# Altium PCB Access_System_Bmduino_V1.2.PcbDoc
Units mil, origin at the board's own origin, x right, y up, seen from the top; angles counter-clockwise.
Board outline 1488.9 x 1907.9 mil, 2 copper layers (Top Layer, Bottom Layer); 34 components, 20 nets, 152 pads, 22 vias.
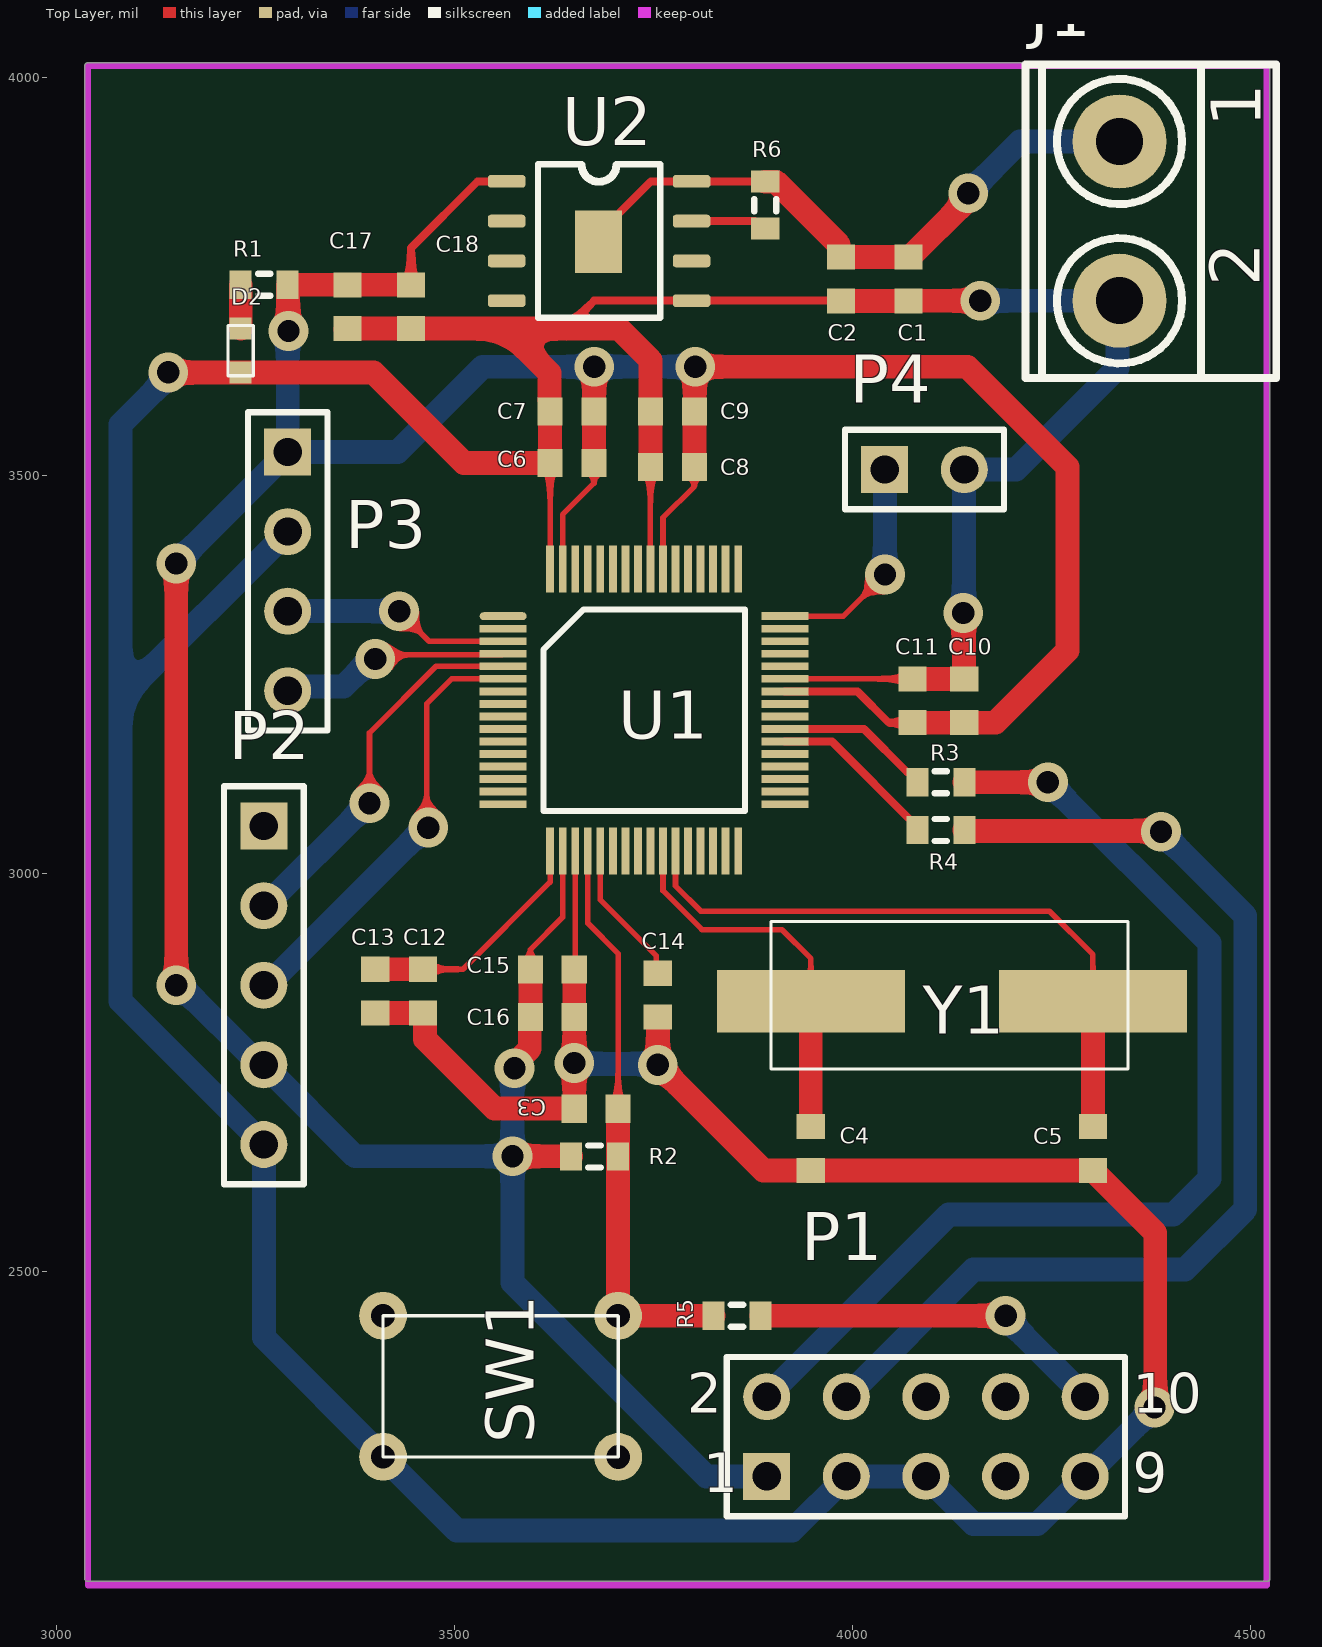
[diagram p0: Top Layer view]
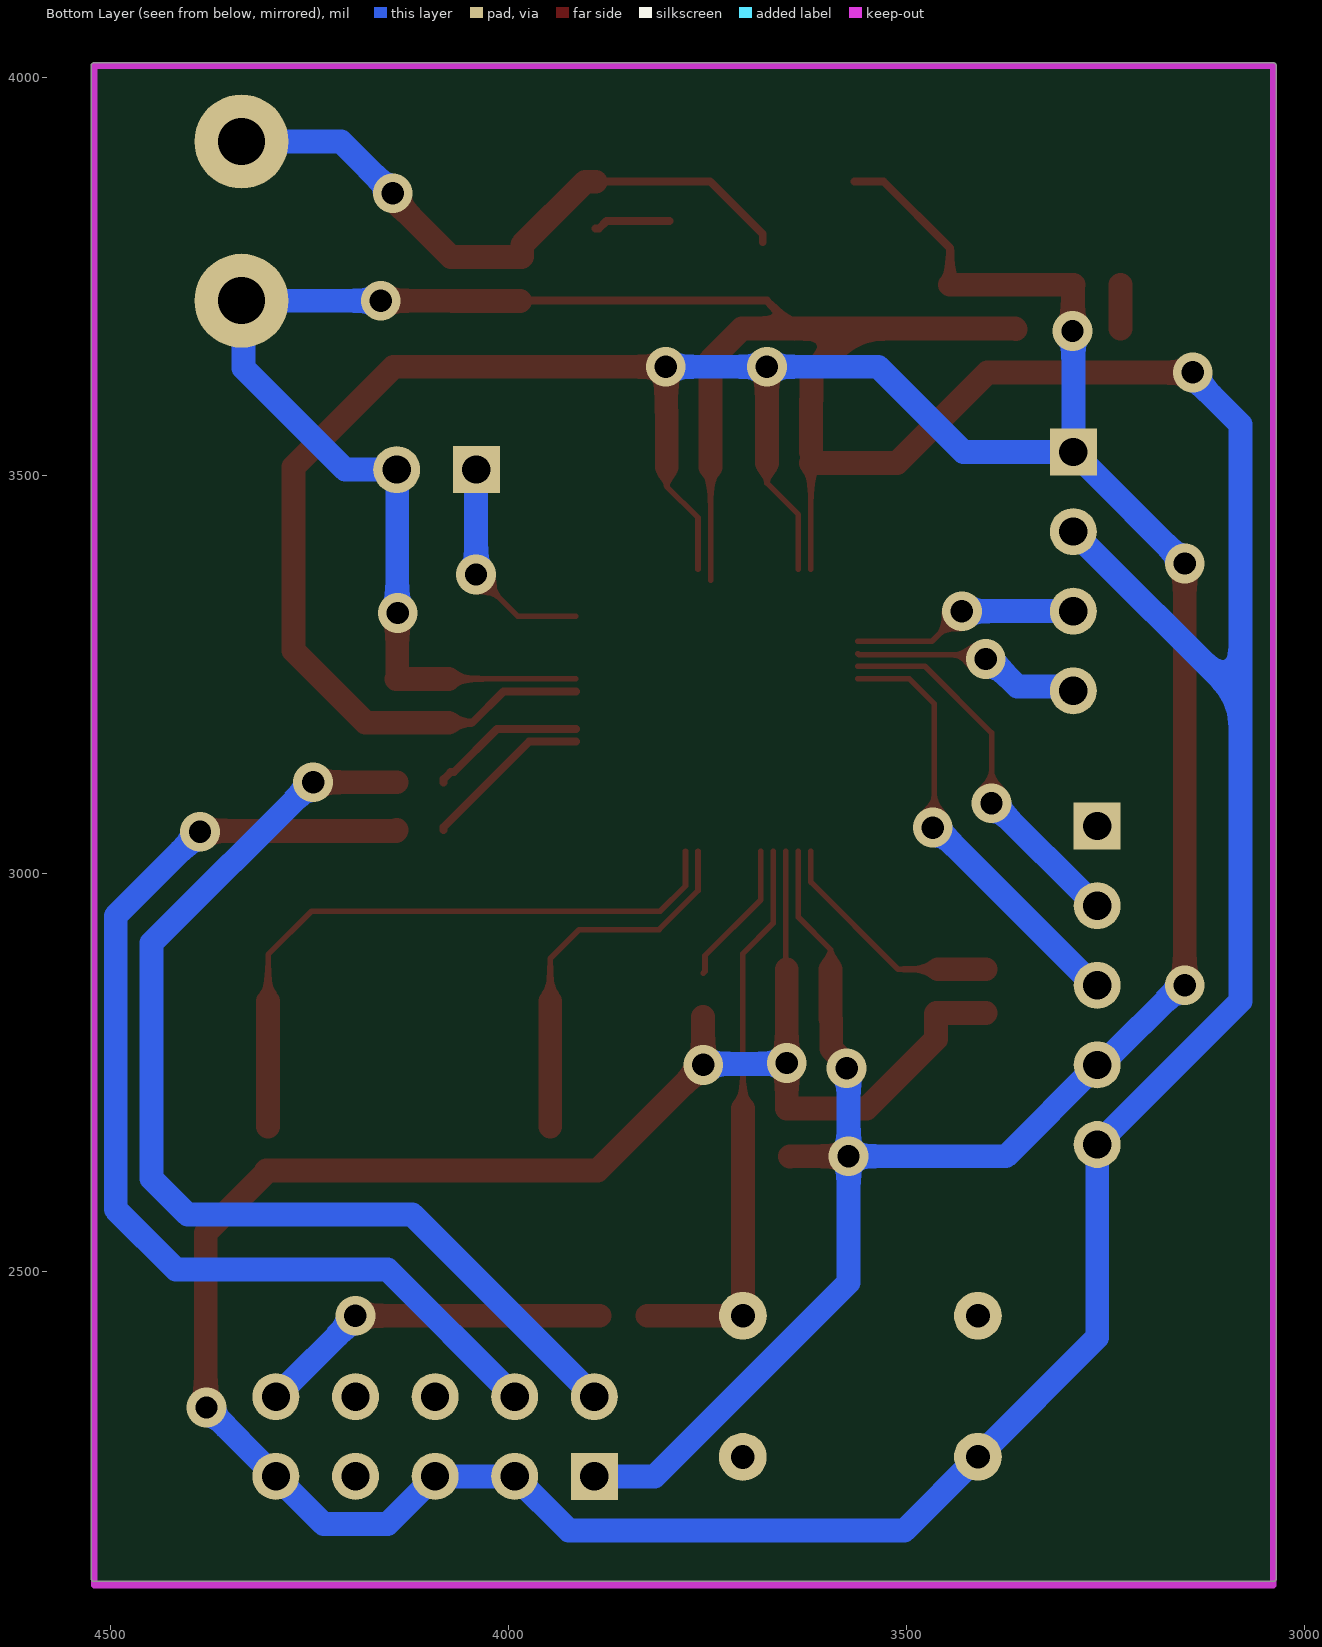
[diagram p1: Bottom Layer view, seen from below]

## Layer stack, top to bottom
Top Solder: solder mask 0.4, Solder Resist, Dk 3.5
Top Layer: signal copper 1.4
Dielectric 1: dielectric 12.6, FR-4, Dk 4.8
Bottom Layer: signal copper 1.4
Bottom Solder: solder mask 0.4, Solder Resist, Dk 3.5

## Board outline
3035.05,2115 3035.05,4015 cw(c3039,4015) 3039,4018.95 4520,4018.95 cw(c4520,4015) 4523.95,4015 4523.95,2115 cw(c4520,2115) 4520,2111.05 3039,2111.05 cw(c3039,2115)

## Design rules (kind name [scope] priority, off if disabled: settings)
Clearance [All] p1: gap=4 ignorepadtopadclearanceinfootprint=FALSE except(0: Arc-Hole Track-Hole SMDPad-Hole THPad-Hole Via-Hole Fill-Hole Poly-Hole Region-Hole Text-Hole)
PolygonConnect [All] p1: connectstyle=Relief reliefconductorwidth=10 reliefentries=4 polygonreliefangle="90 Angle" airgapwidth=10
RoutingVias [All] p1: holewidth=28 width=50 viastyle="Through Hole" minholewidth=28 minwidth=50 maxholewidth=28 maxwidth=50
SolderMaskExpansion [All] p1: expansion=4 istentingtop=FALSE
Width [All] p1: maxlimit=30 minlimit=7 preferedwidth=10 minimp=50.000000 maximp=50.000000 favimp=50.000000
30 further rules are at their usual default settings.

## Components (designator, comment, footprint, x,y, rotation, side; value= is the part's Value field where it differs from the comment)
C1 "Cap Semi" 1608[0603] 4070,3747.44 r90 top value=0.1uF
C2 "Cap Semi" 1608[0603] 3985,3747.44 r90 top value=10uF
C3 "Cap Semi" 1608[0603] 3677.56,2705 r180 top value=0.01uF
C4 "Cap Semi" 1608[0603] 3947.16,2655 r270 top value=12pF
C5 "Cap Semi" 1608[0603] 4301.49,2655 r90 top value=12pF
C6 "Cap Semi" 1608[0603] 3647.28,3516 r180 top value=2.2uF
C7 "Cap Semi" 1608[0603] 3647.28,3581 r0 top value=0.1uF
C8 "Cap Semi" 1608[0603] 3773.27,3511 r180 top value=2.2uF
C9 "Cap Semi" 1608[0603] 3773.27,3581 r0 top value=0.1uF
C10 "Cap Semi" 1608[0603] 4140,3217.44 r90 top value=2.2uF
C11 "Cap Semi" 1608[0603] 4075,3217.44 r270 top value=0.1uF
C12 "Cap Semi" 1608[0603] 3460,2852.56 r270 top value=2.2uF
C13 "Cap Semi" 1608[0603] 3400,2852.56 r90 top value=0.1uF
C14 "Cap Semi" 1608[0603] 3755,2847.56 r90 top value=0.1uF
C15 "Cap Semi" 1608[0603] 3622.44,2880 r0 top value=2.2uF
C16 "Cap Semi" 1608[0603] 3622.44,2820 r180 top value=0.1uF
C17 "Cap Semi" 1608[0603] 3365,3712.44 r90 top value=0.1uF
C18 "Cap Semi" 1608[0603] 3444.88,3712.44 r90 top value=10uF
D2 "green_light" LED_Green 3230.94,3684.88 r270 top
J1 "Terminal_Block" "terminal block" 4082.4,3739.5 r0 top
P1 "SW-DP" HDR2X5 3891.73,2243.11 r0 top
P2 "Wi-Fi_USART1" HDR1X5 3260,3060 r270 top
P3 "Barcode_USART0" HDR1X4 3290,3530 r270 top
P4 "State_LED" HDR1X2 4040,3507.87 r0 top
R1 "Res3" J1-0603 3260.47,3740 r180 top value=100
R2 "Res3" J1-0603 3675.59,2645 r0 top value=100
R3 "Res3" J1-0603 4110.47,3115 r180 top value=100
R4 "Res3" J1-0603 4110.47,3055 r180 top value=100
R5 "Res3" J1-0603 3854.33,2444.88 r180 top value=100
R6 "Res3" J1-0603 3890,3840 r270 top value=100
SW1 "BUTTON_DIP_4PIN" Push_Button 3409.84,2267.72 r0 top
U1 "HT32F52367" HT32H52367 3560.67,3323.74 r0 top
U2 "HT7333-7" HT7333 3604.37,3891.46 r270 top
Y1 "SMD_8MHz" Quartz-Crystal-8MHz 3957,2840 r0 top

## Footprints (in the part's own frame and the unit in brackets; to place one, negate y for a bottom-side part, rotate by r counter-clockwise, add the part's x,y. Pads: shape width x height; smd on the part's side, far side on the other; paste and mask are expansions set on the pad)
1608[0603] [mm] "Chip Capacitor, Body 1.6x0.8mm, IPC High Density"
  rect 0.8x0.9 smd: 1(-0.7,0) 2(0.7,0)
  body extent -0.87,-0.48 0.87,0.48, height 1.3
HDR1X2 [mm] "Connector; Header; 2 Position"
  rect 1.5x1.5 hole 0.9: 1(0,0)
  round 1.5 hole 0.9: 2(2.54,0)
  silkscreen extent -1.27,-1.27 3.81,1.27
HDR1X4 [mm] "Connector; Header; 4 Position"
  rect 1.5x1.5 hole 0.9: 1(0,0)
  round 1.5 hole 0.9: 2(2.54,0) 3(5.08,0) 4(7.62,0)
  silkscreen extent -1.27,-1.27 8.89,1.27
HDR1X5 [mm] "Connector; Header; 5 Position"
  rect 1.5x1.5 hole 0.9: 1(0,0)
  round 1.5 hole 0.9: 2(2.54,0) 3(5.08,0) 4(7.62,0) 5(10.16,0)
  silkscreen extent -1.27,-1.27 11.43,1.27
HDR2X5 [mm] "Connector; Header; 5x2 Position"
  rect 1.5x1.5 hole 0.9: 1(0,0)
  round 1.5 hole 0.9: 2(0,2.54) 3(2.54,0) 4(2.54,2.54) 5(5.08,0) 6(5.08,2.54) 7(7.62,0) 8(7.62,2.54) 9(10.16,0) 10(10.16,2.54)
  silkscreen extent -1.27,-1.27 11.43,3.81
HT32H52367 [mm] "HT32H52367"
  oval 1.5x0.25 smd: 1(0,0)
  rect 1.5x0.25 smd: 2(0,-0.4) 3(0,-0.8) 4(0,-1.2) 5(0,-1.6) 6(0,-2) 7(0,-2.4) 8(0,-2.8) 9(0,-3.2) 10(0,-3.6) 11(0,-4) 12(0,-4.4) 13(0,-4.8) 14(0,-5.2) 15(0,-5.6) 16(0,-6) 33(9,-6) 34(9,-5.6) 35(9,-5.2) 36(9,-4.8) 37(9,-4.4) 38(9,-4) 39(9,-3.6) 40(9,-3.2) 41(9,-2.8) 42(9,-2.4) 43(9,-2) 44(9,-1.6) 45(9,-1.2) 46(9,-0.8) 47(9,-0.4) 48(9,0)
  rect 0.25x1.5 smd: 17(1.5,-7.5) 18(1.9,-7.5) 19(2.3,-7.5) 20(2.7,-7.5) 21(3.1,-7.5) 22(3.5,-7.5) 23(3.9,-7.5) 24(4.3,-7.5) 25(4.7,-7.5) 26(5.1,-7.5) 27(5.5,-7.5) 28(5.9,-7.5) 29(6.3,-7.5) 30(6.7,-7.5) 31(7.1,-7.5) 32(7.5,-7.5) 49(7.5,1.5) 50(7.1,1.5) 51(6.7,1.5) 52(6.3,1.5) 53(5.9,1.5) 54(5.5,1.5) 55(5.1,1.5) 56(4.7,1.5) 57(4.3,1.5) 58(3.9,1.5) 59(3.5,1.5) 60(3.1,1.5) 61(2.7,1.5) 62(2.3,1.5) 63(1.9,1.5) 64(1.5,1.5)
  silkscreen extent 1.28,-6.21 7.71,0.22
HT7333 [mm] "HT7333-7"
  rrect50% 0.41x1.2 smd: 1(0.545,-1) 2(1.815,-1) 3(3.085,-1) 4(4.355,-1) 5(4.355,4.902) 6(3.085,4.902) 7(1.815,4.902) 8(0.545,4.902)
  rect 2x1.5 smd: 9(2.475,1.925)
  silkscreen extent 0,0 4.9,3.9
J1-0603 [mm] "Chip Resistor, Body 1.6x0.8mm, IPC High Density"
  rect 0.7x0.9 smd: 1(-0.75,0) 2(0.75,0)
  silkscreen extent -0.2,-0.35 0.2,0.35, body extent -0.85,-0.48 0.85,0.48, height 0.9
LED_Green [mm] "LED_0603"
  rect 0.7x0.7 smd: 1(0,0) 2(1.4,0)
  silkscreen extent -0.1,-0.4 1.5,0.4
Push_Button [mil] "6*6"
  round 60 hole 30: 1(0,177.17) 2(0,0) 3(295.28,177.17) 4(295.37,-0.17)
  silkscreen extent 0,0 295,177
Quartz-Crystal-8MHz [mm] "Quartz-Crystal-8MHz"
  rect 6x2 smd: 1(-0.25,0) 2(8.75,0)
  silkscreen extent -1.52,-2.16 9.88,2.54
"terminal block" [mm]
  round 3 hole 1.5 paste+0 mask+0.051: 1(6.416,4.585) 2(6.416,-0.495)
  silkscreen extent 3.42,-2.96 11.42,7.04

## Part data
C1 C2 C3 C4 C5 C6 C7 C8 C9 C10 C11 C12 C13 C14 C15 C16 C17 C18: "Capacitor (Semiconductor SIM Model)", LatestRevisionDate=29-May-2009, LatestRevisionNote="IPC-7351 Footprint Added.", PackageDescription="Chip Capacitor", PackageReference=C1206, Published=8-Jun-2000, Publisher="Altium Limited"
D2: library part LED_Green
J1: library part "Terminal Block"
P1: library part "Header 5X2", "Header, 5-Pin, Dual row", LatestRevisionDate=17-Jul-2002, LatestRevisionNote="Re-released for DXP Platform.", Publisher="Altium Limited"
P2: library part "Header 5", "Header, 5-Pin", LatestRevisionDate=17-Jul-2002, LatestRevisionNote="Re-released for DXP Platform.", Publisher="Altium Limited"
P3: library part "Header 4", "Header, 4-Pin", LatestRevisionDate=17-Jul-2002, LatestRevisionNote="Re-released for DXP Platform.", Publisher="Altium Limited"
P4: library part "Header 2", "Header, 2-Pin", LatestRevisionDate=17-Jul-2002, LatestRevisionNote="Re-released for DXP Platform.", Publisher="Altium Limited"
R1 R2 R3 R4 R5 R6: "Resistor", LatestRevisionDate=29-May-2009, LatestRevisionNote="IPC-7351 Footprint Added.", PackageDescription="Chip Resistor", PackageReference=J1-0603, Published=8-Jun-2000, Publisher="Altium Limited"
SW1: library part Push_Button
U2: library part HT7333
Y1: library part Quartz_Crystal_8MHz

## Via types
v1: diameter 50, hole 28, Top Layer to Bottom Layer, 22 vias

## Nets (pads, with @x,y where several pads share a name; then routed paths per layer and width w, separated by ;. In a path a pad name is that pad's centre, name@x,y a point inside that pad or via, vN(x,y) a via of type N, cw(c..) or ccw(c..) an arc to the next point about the centre after c; other vN are vias at no path point)
3.3V: C6.1 C7.2 C8.1 C9.2 C10.1 C11.2 C15.1 C16.2 C17.2 C18.2 P1.1 P2.4 P3.1 R1.1 R2.1 U1.18 U1.42 U1.55 U1.63 U2.1 | length 5130.9
  Top Layer w7: C15.1 3594.88,2904.88 3635.47,2945.47 U1.18 ; U1.63 3635.47,3451.47 3674.84,3490.84 C6.1 ; U1.55 3761.46,3447.46 3800.83,3486.83 C8.1
  Top Layer w10: C18.2 3444.88,3786.16 3528.72,3870 U2.1 ; U1.42 4005.75,3229.25 4045.12,3189.88 C11.2
  Top Layer w30: v1(3150,2860) v1(3150,3390) ; v1(3291,3682) 3290.5,3682.5 3290.5,3739.5 R1.1 C17.2 C18.2 ; v1(3572.34,2645.18) 3645.89,2645.18 R2.1 ; v1(3574.8,2755.91) 3574.8,2761.32 3594.13,2780.65 3594.13,2817.28 3594.88,2818.03 C16.2 C15.1 ; C6.1 C7.2 3674.92,3581.08 3674.92,3636.92 v1(3675,3637) ; C8.1 C9.2 3801.41,3581.59 3801.41,3636.41 v1(3802,3637) 4144,3637 4269.69,3511.32 4269.69,3280.51 4179.06,3189.88 C10.1 C11.2
  Bottom Layer w30: v1(3150,2860) 3155,2860 3255,2760 P2.4 3374.82,2645.18 v1(3572.34,2645.18) ; v1(3150,3390) 3280,3520 3280,3530 P3.1 ; v1(3291,3682) 3290,3681 P3.1 ; v1(3574.8,2755.91) 3572.34,2753.44 v1(3572.34,2645.18) ; v1(3802,3637) v1(3675,3637) 3535,3637 3428,3530 P3.1 ; P1.1 3815.94,2243.11 3572.34,2486.71 v1(3572.34,2645.18)
5V: C1.2 C2.2 J1.1 R6.1 U2.8 U2.9 | length 806.1
  Top Layer w10: U2.9 3680.14,3803.84 3746.3,3870 U2.8 3797.61,3869.76 3889.76,3869.76 R6.1
  Top Layer w30: R6.1 3903.11,3869.53 3982.28,3790.35 3982.28,3775.75 3984.25,3775.75 C2.2 ; C2.2@3983.03,3775 4071.97,3775 4141.17,3844.2 4141.17,3851.17 v1(4145,3855)
  Bottom Layer w30: v1(4145,3855) 4210,3920 J1.1
CLDO: C12.1 C13.2 U1.17 | length 303.9
  Top Layer w7: C12.1 3510.12,2880.12 3619.72,2989.72 U1.17
  Top Layer w30: C13.2 C12.1
GND: C1.1 C2.1 C3.2 C4.2 C5.1 C6.2 C7.1 C8.2 C9.1 C10.2 C11.1 C12.2 C13.1 C14.1 C15.2 C16.1 C17.1 C18.1 D2.2 J1.2 P1.3 P1.5 P1.9 P2.5 P3.2 P4.2 SW1.2 U1.19 U1.43 U1.56 U1.64 U2.5 | length 7748.4
  Top Layer w7: U1.64 C6.2@3619.72,3530 ; C15.2 3651.22,2881.22 U1.19 ; U1.56@3745.71,3368.8 U1.56 C8.2 ; U1.43 C11.1
  Top Layer w10: 3639.88,3684.88 3675,3720 U2.5 3984.88,3720 C2.1
  Top Layer w30: v1(3140,3630) 3140.24,3629.76 D2.2 3397.8,3629.76 3511.56,3516 C6.2 ; C17.1@3362.28,3684.13 3363.03,3684.88 C17.1 C18.1 ; C13.1 C12.2 3461.97,2825 3462.72,2824.25 3462.72,2792.28 3550,2705 C3.2 v1(3650,2762.5) C16.1 C15.2 ; C18.1@3446.85,3684.88 3563.12,3684.88 ; C6.2@3619.72,3530 C7.1 3619.72,3595 3618.98,3595.75 3618.98,3629.02 3563.12,3684.88 ; C8.2 C9.1 3745.71,3645.29 3706.12,3684.88 3639.88,3684.88 3563.12,3684.88 ; C14.1 v1(3755,2760) 3887.56,2627.44 C4.2 C5.1 4303.46,2627.44 4304.2,2626.69 4304.2,2624.72 4379.92,2549.01 4379.92,2330.71 v1(4378.94,2329.72) ; C2.1 C1.1 4070.06,3719.94 4159.94,3719.94 v1(4160,3720) ; C11.1 C10.2@4140.61,3245 ; v1(4138.78,3327.76) 4139.39,3327.15 4139.39,3245.75 C10.2@4140.14,3245
  Bottom Layer w30: v1(3140,3630) 3140,3624.59 3080,3564.59 3080,3220 ; P3.2@3295.37,3435.37 3080,3220 ; v1(3650,2762.5) 3651.25,2761.25 3753.75,2761.25 v1(3755,2760) ; v1(4138.78,3327.76) 4139.39,3328.37 4139.39,3507.26 P4.2 4204.72,3507.87 4332.35,3635.5 4332.35,3717.35 J1.2 v1(4160,3720) ; v1(4378.94,2329.72) 4378.64,2329.72 4292.03,2243.11 P1.9 4231.69,2183.07 4151.77,2183.07 P1.5 P1.3 3923.82,2175.2 3502.36,2175.2 SW1.2 3260,2417.56 P2.5 3080,2840 3080,3220
GPIO_LED_PD3: P4.1 U1.48 | length 279
  Top Layer w7: U1.48 3988.11,3323.74 v1(4040.35,3375.98)
  Bottom Layer w30: P4.1 4040.18,3507.7 4040.18,3376.16 v1(4040.35,3375.98)
NetD2_1: D2.1 R1.2 | length 55.1
  Top Layer w30: D2.1 R1.2
NetP1_2: P1.2 R3.1 | length 1357.1
  Top Layer w30: R3.1 v1(4245,3115)
  Bottom Layer w30: P1.2 4120.47,2571.85 4402.56,2571.85 4447.83,2617.13 4447.83,2913.17 4246,3115 v1(4245,3115)
NetP1_4: P1.4 R4.1 | length 1364.9
  Top Layer w30: R4.1 4141,3054 4386,3054 v1(4387,3053)
  Bottom Layer w30: P1.4 4151.57,2502.95 4417.32,2502.95 4493,2578.63 4493,2947 v1(4387,3053)
NetP1_10: P1.10 R5.1 | length 450
  Top Layer w30: R5.1@3885.08,2444.88 v1(4191.93,2444.88)
  Bottom Layer w30: v1(4191.93,2444.88) 4191.93,2442.91 P1.10
nRST: C3.1 R2.2 R5.2 SW1.3 U1.20 | length 719.1
  Top Layer w7: U1.20 3666.97,2938.03 3705.12,2899.88 C3.1
  Top Layer w30: C3.1 R2.2 3705.06,2644.94 3705.06,2510.33 3705.12,2510.28 SW1.3 R5.2
SWCLK_PA12: R4.2 U1.38 | length 214.3
  Top Layer w10: U1.38 3973.62,3166.26 4080.94,3058.94 R4.2
SWDIO_PA13: R3.2 U1.39 | length 196
  Top Layer w10: U1.39 4013.94,3182.01 4068.23,3127.72 4072.17,3127.72 4080.94,3118.94 R3.2
USART0_Rx_PA2: P3.3 U1.3 | length 286.3
  Top Layer w7: v1(3430,3330) 3467.76,3292.24 U1.3
  Bottom Layer w30: P3.3 v1(3430,3330)
USART0_Tx_PA3: P3.4 U1.4 | length 287.9
  Top Layer w7: v1(3400,3270) 3405.07,3275.07 3559.25,3275.07 U1.4
  Bottom Layer w30: P3.4@3292,3230 3297.56,3235.56 3360.15,3235.56 3394.59,3270 v1(3400,3270)
USART1_Rx_PA4: P2.2 U1.5 | length 478.5
  Top Layer w7: v1(3392.72,3088.58) 3392.72,3177.17 3476.3,3260.75 U1.5
  Bottom Layer w30: P2.2@3259.07,2959.07 3261.13,2959.07 3390.65,3088.58 v1(3392.72,3088.58)
USART1_Tx_PA5: P2.3 U1.6 | length 554
  Top Layer w7: v1(3466.54,3058.07) 3464.57,3060.04 3464.57,3213.58 3495.98,3245 U1.6
  Bottom Layer w30: P2.3 3264.23,2860 3462.3,3058.07 v1(3466.54,3058.07)
VBAT: C14.2 U1.21 | length 183.3
  Top Layer w7: U1.21 3682.72,2967.28 3752.73,2897.27 3752.73,2877.38 C14.2
VCE: R6.2 U2.7 | length 96.6
  Top Layer w10: U2.7 3876.54,3820 3886.06,3810.47 R6.2
XTALIN_PB13: C4.1 U1.26 Y1.1 | length 481.5
  Top Layer w7: U1.26 3761.46,2978.99 3810.44,2930 3910.68,2930 3947.16,2893.52 Y1.1
  Top Layer w30: C4.1 Y1.1
XTALOUT_PB14: C5.2 U1.27 Y1.2 | length 819.6
  Top Layer w7: U1.27 3777.2,2984.8 3809,2953 4247,2953 4301.49,2898.51 Y1.2
  Top Layer w30: C5.2 Y1.2
pads on no net: P1.6 P1.7 P1.8 P2.1 SW1.1 SW1.4 U1.1 U1.2 U1.7 U1.8 U1.9 U1.10 U1.11 U1.12 U1.13 U1.14 U1.15 U1.16 U1.22 U1.23 U1.24 U1.25 U1.28 U1.29 U1.30 U1.31 U1.32 U1.33 U1.34 U1.35 U1.36 U1.37 U1.40 U1.41 U1.44 U1.45 U1.46 U1.47 U1.49 U1.50 U1.51 U1.52 U1.53 U1.54 U1.57 U1.58 U1.59 U1.60 U1.61 U1.62 U2.2 U2.3 U2.4 U2.6

## Keep-outs
Keep-Out Layer:
  lines w7.87: 3039,2106.3 3039,4015 4520,4015 4520,2106.3 3039,2106.3

## Silkscreen, mask and mechanical layers (free items; w line width, h text height)
Mechanical 13:
  lines w10: 2950,2170 2970,2110 ; 2950,3960 2970,4020 ; 2960,2110 2980,2110 ; 2960,4020 2980,4020 ; 2970,2754.1 2970,2110 ; 2970,3375.9 2970,4020 ; 2990,2170 2970,2110 ; 2990,3960 2970,4020 ; 3040,4040 3040,4060 ; 3100,4030 3040,4050 ; 3100,4070 3040,4050 ; 3464.1,4050 3040,4050 ; 4095.9,4050 4520,4050 ; 4460,4030 4520,4050 ; 4460,4070 4520,4050 ; 4520,4040 4520,4060
  text "37.592 (mm)" at 3474.1,4014.01 h60
  text "48.514 (mm)" at 3005.99,2764.1 h60 r90

## Text inside footprints (layer, text, board x,y; h text height)
J1: Top Overlay "1" at 4512.5,3937.7 h62.99 r90; Top Overlay "2" at 4511.2,3738.1 h62.99 r90
P1: Top Overlay "2" at 3791.73,2323.11 h50; Top Overlay "1" at 3811.73,2223.11 h50; Top Overlay "9" at 4351.73,2223.11 h50; Top Overlay "10" at 4351.73,2323.11 h50